# EAGLE board Stepper Driver jig bottom (EAGLE 6.6.0)
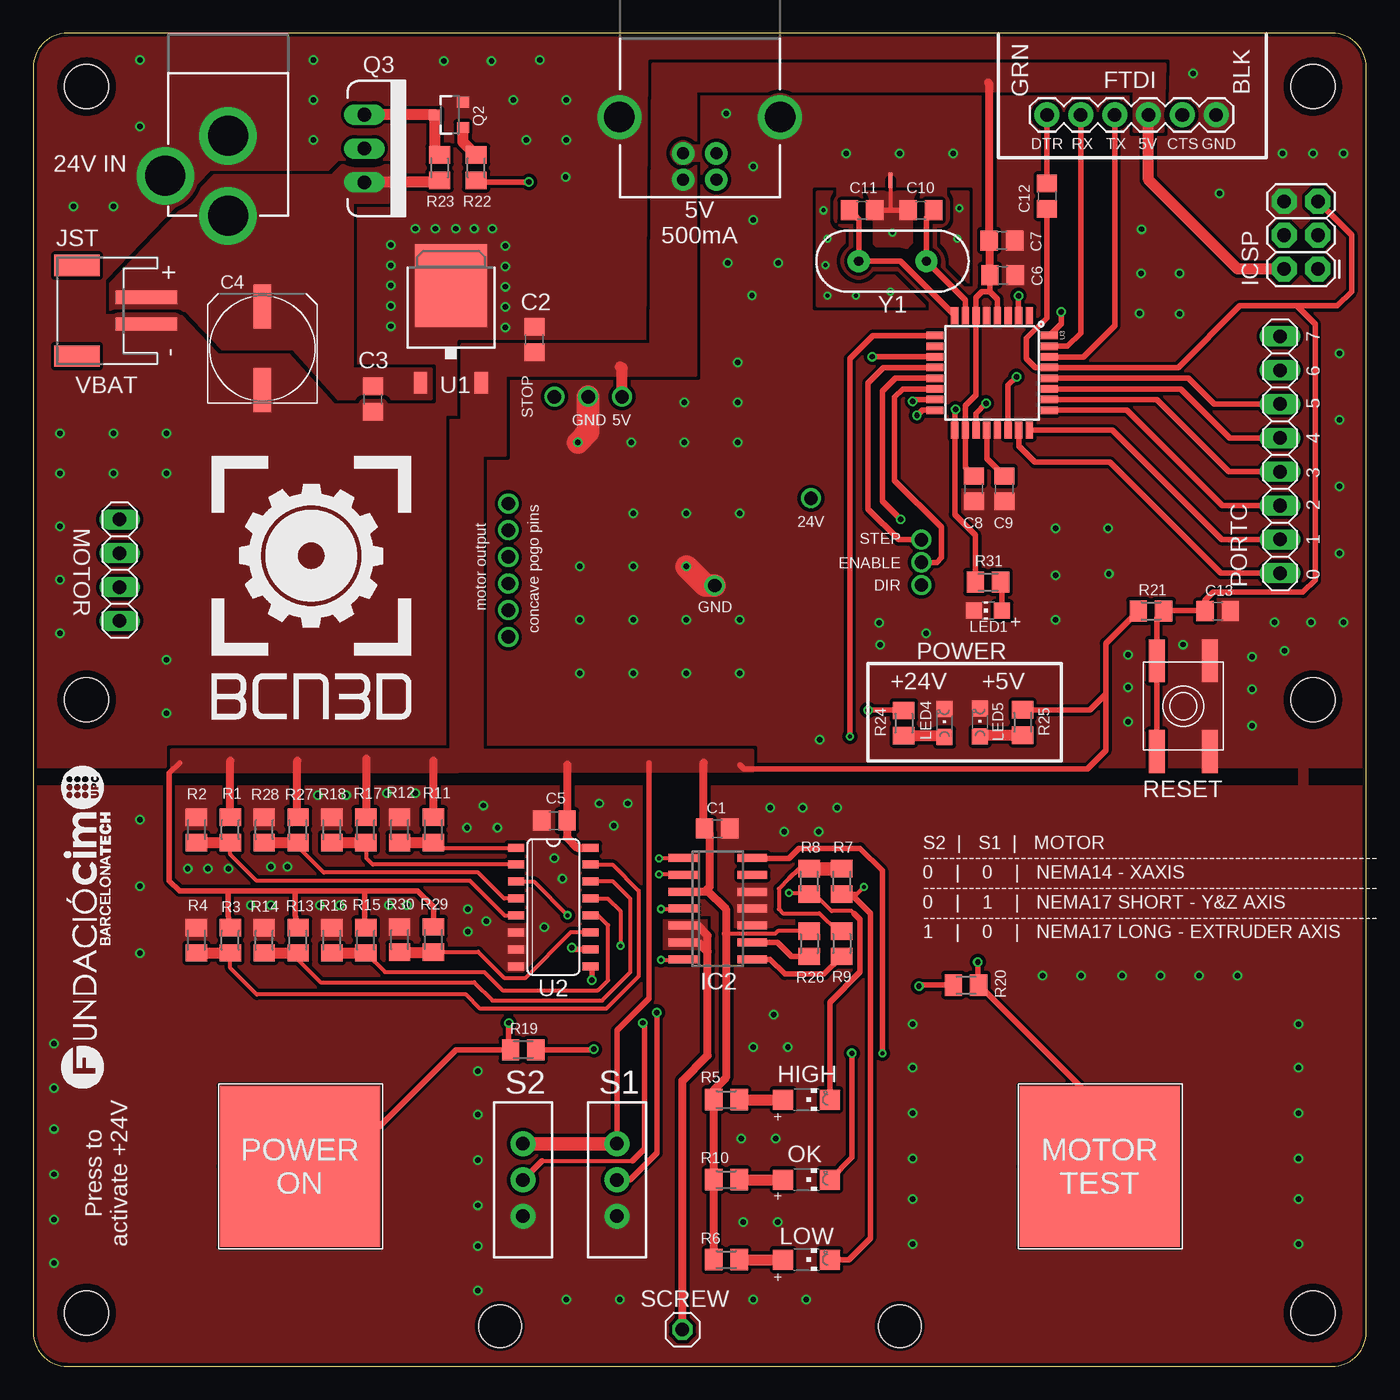
[diagram p0: board, top side]
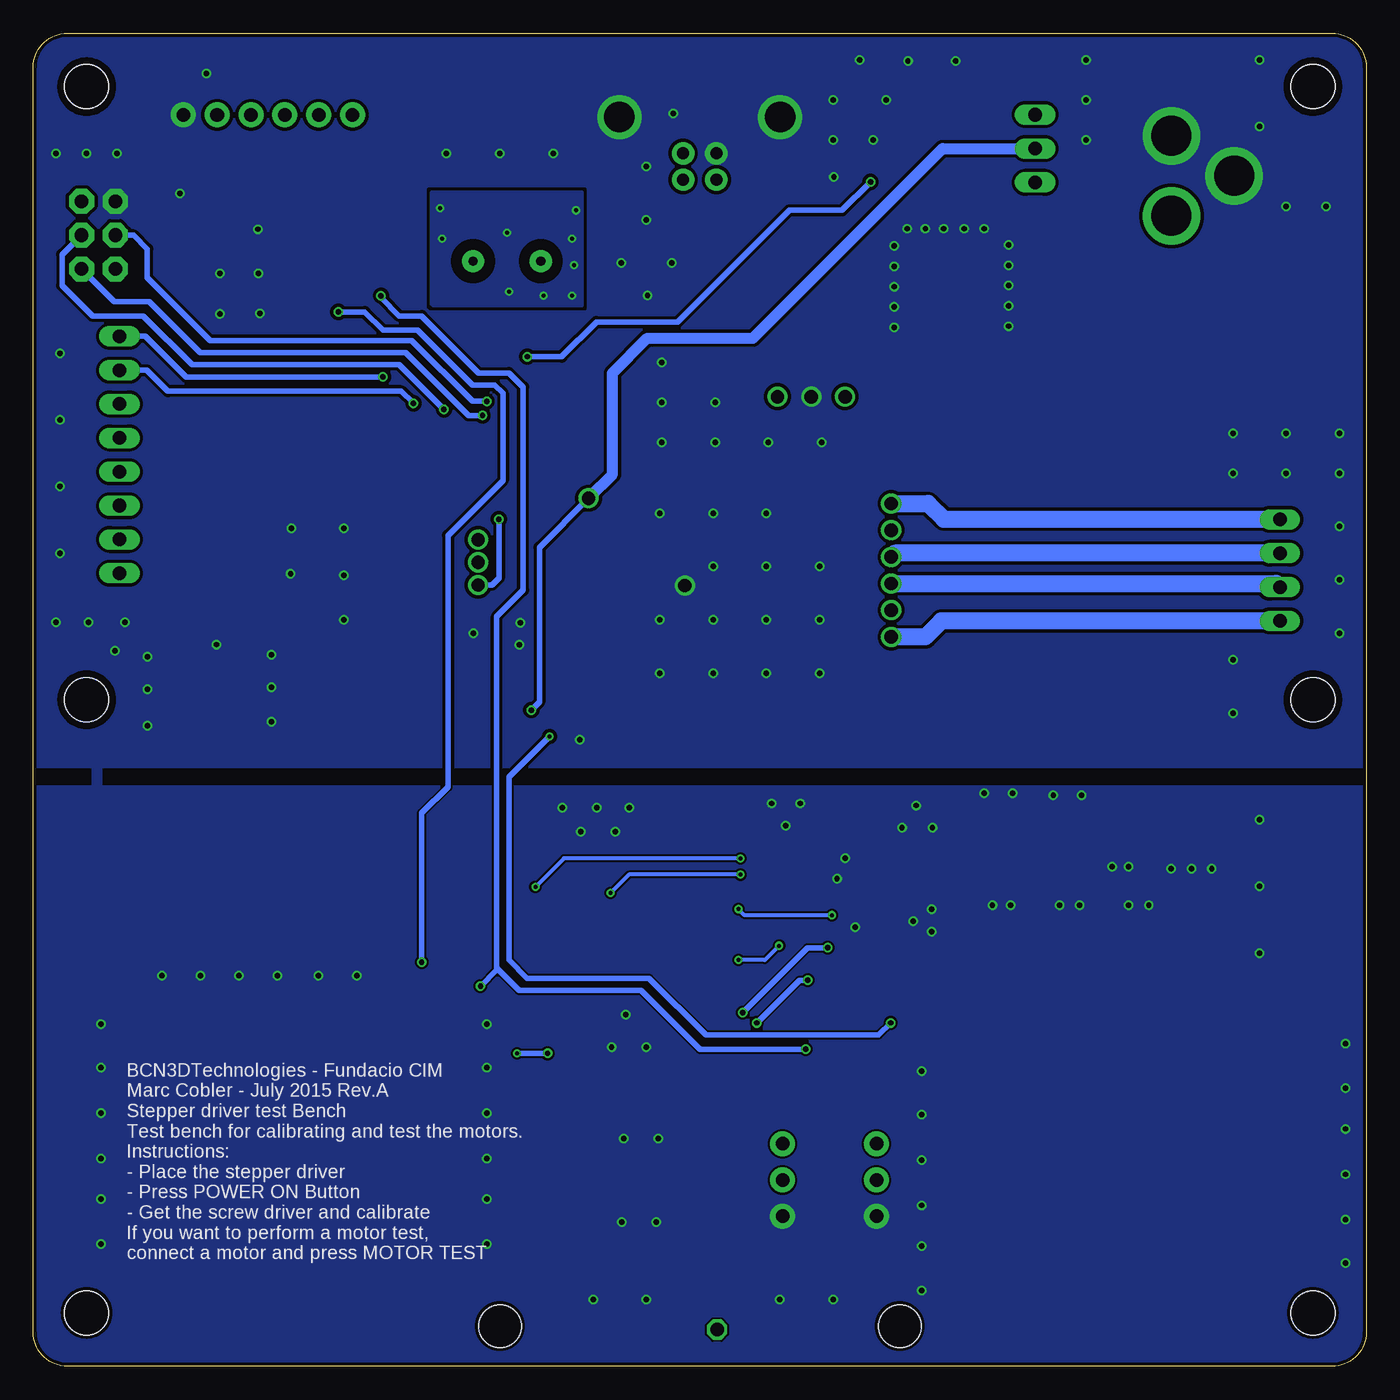
[diagram p1: board, bottom side, seen from below]

Size 100 x 100 mm. Coordinates in mm from the lower left corner, seen from the top.
Outline: 0,97.46 0,2.54 arc90 2.54,0 97.46,0 arc90 100,2.54 100,97.46 arc90 97.46,100 2.54,100 arc90 0,97.46
Copper layers (1*16): Top 0.035mm / dielectric 1.5mm / Bottom 0.035mm
Design rules "ITEADstudio_DRC": minimum track width 6mil, minimum drill 12mil, track to track 6mil, track to pad 6mil, pad to pad 6mil, via to via 6mil, smd to smd 0mil, copper to edge 10mil, drill to drill 10mil, minimum pad ring 10mil, minimum via ring 6mil, stop-mask expansion 2mil, vias tented up to drill 100mil, thermal gap 10mil
Holes 3.2 mm at 35,3 65,3

## Footprints (pad centres in the part's own frame; a part is rotated, then mirrored left to right if it is on the bottom)
C0805 = smd 1.3 x 1.5: 1 -0.95,0; 2 0.95,0
UD-8X10_NICHICON = smd 3.3 x 1.3: + 3.125,0; - -3.125,0
FTDI_BASIC = drill 1.016 pad 1.88: CTS 10.16,0; DTR 0,0; GND 12.7,0; RXI 2.54,0; TXO 5.08,0; VCC 7.62,0
CHIPLED_1206 = smd 1.5 x 1.5: A 0,-1.75; C 0,1.75
SO14 = smd 0.6 x 2.2: 1 -3.81,-2.6; 2 -2.54,-2.6; 3 -1.27,-2.6; 4 0,-2.6; 5 1.27,-2.6; 6 2.54,-2.6; 7 3.81,-2.6; 8 3.81,2.6; 9 2.54,2.6; 10 1.27,2.6; 11 0,2.6; 12 -1.27,2.6; 13 -2.54,2.6; 14 -3.81,2.6
2X3 = drill 1.016 pad 1.88 octagon: 1 0,0; 2 0,2.54; 3 2.54,0; 4 2.54,2.54; 5 5.08,0; 6 5.08,2.54
POWER_JACK_PTH = drill 2.997 pad 4.318: GND 0,7.7; GNDBREAK 4.7,10.7; PWR 0,13.7
POGOPIN = drill 1 pad 1.27: P$1 0,0
JST-PH-2-SMT-RA = smd 1 x 4.6: 1 1,-3.7; 2 -1,-3.7 | smd 1.6 x 3.4: NC1 -3.4,1.5; NC2 3.4,1.5
CHIP-LED0805 = smd 1.2 x 1.2: A 0,-1.05; C 0,1.05
CHIPLED_0805 = smd 1.2 x 1.2: A 0,-1.05; C 0,1.05
1X04 = drill 1.016 long: 1 -3.81,0; 2 -1.27,0; 3 1.27,0; 4 3.81,0
1X08 = drill 1.016 long: 1 -8.89,0; 2 -6.35,0; 3 -3.81,0; 4 -1.27,0; 5 1.27,0; 6 3.81,0; 7 6.35,0; 8 8.89,0
SOT23-3 = smd 0.8 x 0.9: 1 -0.95,-1; 2 0.95,-1; 3 0,1.1
TO220V = drill 1.016 long: 1 -2.54,0; 2 0,0; 3 2.54,0
M0805 = smd 1.3 x 1.6: 1 -0.95,0; 2 0.95,0
EVQ-Q2 = smd 3.2 x 1.2: A -3.4,-2; A' 3.4,-2; B -3.4,2; B' 3.4,2
SWITCH-SPDT_KIT = drill 1.016 pad 1.88: 1 0,2.718; 2 0,0; 3 0,-2.718
1X01 = drill 1.016 octagon: 1 0,0
SHORT_TOP-50 = smd 0.61 x 0.305: 1 0.381,0; 2 -0.127,0
TO-252 = smd 1 x 1.6: 1 -2.28,-4.8; 2 2.28,-4.8 | smd 5.4 x 6.2: 3 0,2.5
SO16 = smd 0.6 x 1.2: 1 -4.445,-2.8; 2 -3.175,-2.8; 3 -1.905,-2.8; 4 -0.635,-2.8; 5 0.635,-2.8; 6 1.905,-2.8; 7 3.175,-2.8; 8 4.445,-2.8; 9 4.445,2.8; 10 3.175,2.8; 11 1.905,2.8; 12 0.635,2.8; 13 -0.635,2.8; 14 -1.905,2.8; 15 -3.175,2.8; 16 -4.445,2.8
TQFP32-08 = smd 1.27 x 0.559: 1 -4.293,2.8; 2 -4.293,2; 3 -4.293,1.2; 4 -4.293,0.4; 5 -4.293,-0.4; 6 -4.293,-1.2; 7 -4.293,-2; 8 -4.293,-2.8; 17 4.293,-2.8; 18 4.293,-2; 19 4.293,-1.2; 20 4.293,-0.4; 21 4.293,0.4; 22 4.293,1.2; 23 4.293,2; 24 4.293,2.8 | smd 0.559 x 1.27: 9 -2.8,-4.293; 10 -2,-4.293; 11 -1.2,-4.293; 12 -0.4,-4.293; 13 0.4,-4.293; 14 1.2,-4.293; 15 2,-4.293; 16 2.8,-4.293; 25 2.8,4.293; 26 2,4.293; 27 1.2,4.293; 28 0.4,4.293; 29 -0.4,4.293; 30 -1.2,4.293; 31 -2,4.293; 32 -2.8,4.293
CAPSENSE_PAD = smd 12 x 6.1: P$1 0,3; P$2 0,-3
USB-B-PTH = drill 0.914 pad 1.676: D+ 0,1.25; D- 1.981,1.25; GND 0,-1.25; VBUS 1.981,-1.25 | drill 2.286: S1 -2.718,-6.02; S2 -2.718,6.02
STAND-OFF = hole 3.302: 0,0
HC49US = drill 0.7 pad 1.651: 1 -2.54,0; 2 2.54,0

## Placement (x,y rotation side)
C1  100n  [C0805]  51.31,40.34 0 top
C2  1uF  [C0805]  37.59,77.01 90 top
C3  0.33uF  [C0805]  25.48,72.56 270 top
C4  100uF  [UD-8X10_NICHICON]  17.19,76.35 90 top
C5  100n  [C0805]  39.09,40.93 180 top
C6  100n  [C0805]  72.72,81.84 0 top
C7  100n  [C0805]  72.67,84.46 0 top
C8  100n  [C0805]  70.56,65.84 270 top
C9  100n  [C0805]  72.85,65.84 270 top
C10  22p  [C0805]  66.6,86.72 180 top
C11  22p  [C0805]  62.18,86.72 0 top
C12  100n  [C0805]  76.05,87.78 90 top
C13  100n  [C0805]  88.86,56.65 0 top
FTDI  FTDI_BASICPTH  [FTDI_BASIC]  76.05,93.88 0 top
HIGH  [CHIPLED_1206]  58,20 270 top
IC2  LM339D  [SO14]  51.34,34.33 270 top
ICSP  AVR_SPI_PRG_6PTH  [2X3]  96.38,82.31 90 top
JP1  POWER_JACKPTH  [POWER_JACK_PTH]  14.6,100.01 180 top
JP2  [POGOPIN]  35.64,64.72 0 top
JP3  [POGOPIN]  35.64,62.72 0 top
JP4  [POGOPIN]  35.64,60.72 0 top
JP5  [POGOPIN]  35.64,58.72 0 top
JP6  [POGOPIN]  35.64,56.72 0 top
JP7  [POGOPIN]  35.64,54.72 0 top
JP8  [POGOPIN]  51.11,58.57 0 top
JP9  [POGOPIN]  58.35,65.12 0 top
JP10  [POGOPIN]  66.63,62.01 0 top
JP11  [POGOPIN]  66.63,58.61 0 top
JP12  [POGOPIN]  66.63,60.31 0 top
JP13  [POGOPIN]  44.17,72.74 90 top
JP14  [POGOPIN]  41.63,72.74 90 top
JP15  [POGOPIN]  39.09,72.74 90 top
JST  [JST-PH-2-SMT-RA]  4.78,79.18 90 top
LED1  [CHIP-LED0805]  71.63,56.69 90 top
LED4  [CHIPLED_0805]  68.36,48.25 0 top
LED5  [CHIPLED_0805]  71.02,48.3 0 top
LOW  [CHIPLED_1206]  58,8 270 top
MOTOR  [1X04]  6.48,59.72 270 top
OK  [CHIPLED_1206]  58,14 270 top
PORTC  [1X08]  93.54,68.38 90 top
Q2  MMBT2222A  [SOT23-3]  31.24,93.88 90 top
Q3  MOSFET-PCHANNELFQP27P06  [TO220V]  24.84,91.35 270 top
R1  [M0805]  14.78,40.23 270 top
R2  [M0805]  12.24,40.23 270 top
R3  [M0805]  14.78,31.95 270 top
R4  [M0805]  12.24,31.95 270 top
R5  1K  [M0805]  52,20 180 top
R6  1K  [M0805]  52,8 180 top
R7  68.1K  [M0805]  60.66,36.37 270 top
R8  68.1K  [M0805]  58.22,36.37 270 top
R9  10K  [M0805]  60.66,31.7 90 top
R10  1K  [M0805]  52,14 180 top
R11  [M0805]  30.02,40.23 270 top
R12  [M0805]  27.48,40.23 270 top
R13  [M0805]  19.86,31.95 270 top
R14  [M0805]  17.32,31.95 270 top
R15  [M0805]  24.94,31.95 270 top
R16  [M0805]  22.4,31.95 270 top
R17  [M0805]  24.94,40.23 270 top
R18  [M0805]  22.4,40.23 270 top
R19  10M  [M0805]  36.75,23.74 0 top
R20  10M  [M0805]  69.98,28.59 180 top
R21  10K  [M0805]  83.86,56.66 180 top
R22  100  [M0805]  33.22,89.92 270 top
R23  10K  [M0805]  30.48,89.92 90 top
R24  5.6K  [M0805]  65.31,48.25 90 top
R25  5.6K  [M0805]  74.23,48.3 90 top
R26  68.1K  [M0805]  58.22,31.7 90 top
R27  [M0805]  19.86,40.23 270 top
R28  [M0805]  17.32,40.23 270 top
R29  [M0805]  30.02,32 270 top
R30  [M0805]  27.48,32 270 top
R31  1K  [M0805]  71.63,58.83 180 top
RESET  SPST_TACT-EVQQ2  [EVQ-Q2]  86.28,49.52 270 top
S1  [SWITCH-SPDT_KIT]  43.79,13.97 0 top
S2  [SWITCH-SPDT_KIT]  36.74,13.97 0 top
SCREW  [1X01]  48.7,2.74 0 top
SH1  SHORTT5  [SHORT_TOP-50]  64.31,88.85 90 top
U1  +5V  [TO-252]  31.34,78.57 0 top
U2  74HC4052  [SO16]  39.02,34.45 270 top
U3  ATMEGA328P  [TQFP32-08]  71.93,74.52 270 top
U$1  CAPSENSE_PAD  [CAPSENSE_PAD]  80,15 0 top
U$2  CAPSENSE_PAD  [CAPSENSE_PAD]  20,15 0 top
U$3  USB+SHIELD  [USB-B-PTH]  50,91 270 top
U$4  [STAND-OFF]  96,96 0 top
U$5  [STAND-OFF]  4,96 0 top
U$6  [STAND-OFF]  4,4 0 top
U$7  [STAND-OFF]  96,4 0 top
U$8  [STAND-OFF]  96,50 0 top
U$9  [STAND-OFF]  4,50 0 top
U$10  [FCIM_LOGO]  9.46,19.01 90 top
U$11  [BCN3D_LOGO]  13.38,48.53 0 top
Y1  [HC49US]  64.47,82.91 0 top

## Library data of the parts
C1-C13 = rcl
FTDI ICSP U$3 = SparkFun-Connectors
HIGH JST LED1 LED4 LED5 LOW OK R1-R31 RESET = adafruit
IC2 = linear
JP1 = SparkFun-Connectors; PROD_ID: CONN-08197
JP2-JP15 U$10 U$11 = MarcEagleParts
MOTOR PORTC SCREW = pinhead
Q2 = SparkFun-DiscreteSemi; PROD_ID: TRANS-08049
Q3 = SparkFun-DiscreteSemi
S1 S2 = SparkFun-Electromechanical; PROD_ID: SWCH-08261
SH1 = shorts; BOM: no
U1 = SparkFun-PowerIC; PROD_ID: VREG-12370
U2 = SparkFun-AnalogIC; PROD_ID: IC-09813
U3 = SparkFun-DigitalIC; PROD_ID: IC-09069
U$1 U$2 U$4-U$9 = SparkFun-Electromechanical
Y1 = SparkFun-FreqCtrl

## Nets
5V: C1.1 C2.1 C5.1 C6.1 C7.1 C8.1 FTDI.VCC IC2.3 ICSP.2 JP13.P$1 R1.1 R3.1 R5.2 R6.2 R10.2 R11.1 R13.1 R15.1 R17.1 R21.2 R25.2 R26.2 R27.1 R29.1 S1.1 S2.1 U1.2 U2.16 U3.4 U3.6 U3.18 U$3.VBUS
24VON: JP9.P$1 Q3.2 R24.2
24VPWR: R22.2 U3.11
!ENABLE: JP12.P$1 U3.14
!RESET: C12.1 C13.1 ICSP.5 R21.1 RESET.A RESET.A' U3.29
CGND: C10.2 C11.2 SH1.2
CTS: FTDI.CTS
DIR: JP11.P$1 U3.13
DTR: C12.2 FTDI.DTR
GND: C1.2 C2.2 C3.2 C4.- C5.2 C6.2 C7.2 C8.2 C9.2 C13.2 FTDI.GND IC2.10 IC2.11 IC2.12 ICSP.6 JP1.GND JP1.GNDBREAK JP8.P$1 JP14.P$1 JST.2 LED1.C LED4.C LED5.C Q2.2 R2.1 R4.1 R12.1 R14.1 R16.1 R18.1 R28.1 R30.1 RESET.B RESET.B' S1.3 S2.3 SH1.1 U1.3 U2.6 U2.7 U2.8 U3.3 U3.5 U3.21 U$3.GND U$3.S1 U$3.S2
MISO: ICSP.1 U3.16
MOSI: ICSP.4 U3.15
N$2: IC2.4 U2.3
N$3: IC2.7 U2.13
N$4: IC2.1 LOW.C R7.2
N$5: LOW.A R6.1
N$6: HIGH.C IC2.2 R8.2
N$7: HIGH.A R5.1
N$8: R7.1 R8.1 R9.2
N$9: IC2.8 R9.1
N$10: OK.A R10.1
N$11: IC2.14 OK.C
N$12: R11.2 R12.2 U2.1
N$13: R1.2 R2.2 U2.5
N$14: R3.2 R4.2 U2.15
N$15: R13.2 R14.2 U2.14
N$16: R15.2 R16.2 U2.12
N$17: R17.2 R18.2 U2.2
N$19: S1.2 U2.10
N$20: S2.2 U2.9
N$21: R19.1 U3.9 U$2.P$1 U$2.P$2
N$22: C11.1 U3.8 Y1.1
N$23: C9.1 U3.20
N$24: C10.1 U3.7 Y1.2
N$25: Q2.3 Q3.1 R23.2
N$26: Q2.1 R22.1
N$27: R19.2 R20.2 U3.2
N$29: R20.1 U3.32 U$1.P$1 U$1.P$2
N$30: JP5.P$1 MOTOR.3
N$31: JP4.P$1 MOTOR.2
N$32: JP3.P$1
N$33: JP6.P$1
N$36: JP15.P$1
N$38: JP2.P$1 MOTOR.1
N$41: LED4.A R24.1
N$42: LED5.A R25.1
N$45: U3.1
N$46: U3.10
N$47: JP7.P$1 MOTOR.4
N$48: IC2.9 R26.1
N$49: R27.2 R28.2 U2.4
N$50: R29.2 R30.2 U2.11
N$51: LED1.A R31.1
PC0: PORTC.1 U3.23
PC1: PORTC.2 U3.24
PC2: PORTC.3 U3.25
PC3: PORTC.4 U3.26
PC4: PORTC.5 U3.27
PC5: PORTC.6 U3.28
PC6: PORTC.7 U3.19
PC7: PORTC.8 U3.22
RX: FTDI.RXI U3.31
SCK: ICSP.3 R31.2 U3.17
SCREW: IC2.5 IC2.6 SCREW.1
STEP: JP10.P$1 U3.12
TX: FTDI.TXO U3.30
VIN: C3.1 C4.+ JP1.PWR JST.1 Q3.3 R23.1 U1.1

## Tracks (layer width: path | path; a pad name or v marks a point on that pad's centre or on a via)
5V
  Top 0.305: R26.2 55.87,32.65 55.65,32.44 51.99,32.44 51.97,32.46
  Top 0.406: 24.84,35.66 28.84,35.66 30.02,34.48 R29.1 | 24.84,35.66 19.66,35.66 | 19.66,35.66 14.63,35.66 | 14.63,35.66 10.97,35.66 10.21,36.42 10.21,44.5 10.97,45.26 | 53.03,45.11 53.34,44.8 79.09,44.8 80.47,46.18 80.47,50.44 | S1.1 43.79,25.19 46.18,27.58 46.18,45.26 | R15.1 24.84,33.77 24.84,35.66 | R13.1 19.66,33.87 19.66,35.66 | R3.1 14.63,33.82 14.63,35.66 | C6.1 71.77,80.63 | 71.77,80.63 72.33,80.07 U3.4 | 71.77,80.63 71.76,80.62 71.17,80.62 70.73,80.18 U3.6 70.71,78.8 70.71,72.85 69.93,72.07 U3.18 69.93,67.42 C8.1 | R21.2 80.47,54.22 80.47,50.44 | R25.2 79.27,49.25 80.47,50.44
  Top 0.61: R1.1 14.78,45.41 | R27.1 19.81,41.23 19.81,45.41 | R17.1 24.99,41.23 24.99,45.57 | R11.1 30.02,45.41 | 40.08,45.11 40.08,40.96 C5.1 40.04,39.66 40.81,38.9 U2.16 | 50.29,45.26 50.29,40.4 C1.1 50.75,39.94 50.75,35.97 50.52,35.74 | 50.52,35.74 50.38,35.59 IC2.3 | R6.2 R10.2 R5.2 51.05,20.72 51.97,21.64 51.97,32.46 51.97,34.29 50.52,35.74 | 71.63,96.32 71.72,96.23 C7.1 71.72,81.89 C6.1
  Top 0.813: ICSP.2 90.35,82.31 83.67,89 FTDI.VCC | JP13.P$1 44.17,74.85 44.04,74.98
  Top 1.016: S2.1 S1.1
  pour Top (isolate 0.406, no thermals): 32.22,76.66 40.08,76.66 40.08,74.37 35.36,74.37 35.36,68.36 33.65,68.36 33.65,46.18 53.94,46.18 53.94,44.65 31.36,44.65 31.36,70.95 32.22,70.95
  pour Top (isolate 0.406, no thermals): 84.73,92.66 82.6,92.66 82.6,95.71 49.68,95.71 49.68,74.37 39.17,74.37 39.17,76.66 46.33,76.66 46.48,97.69 84.89,97.69
  pour Top (isolate 0.406, no thermals): 31.85,46.18 10.36,46.18 10.36,44.65 31.85,44.65
24VON  (via drill 0.41)
  Top 0.406: v62.64,49.23 65.28,49.23 R24.2
  Bottom 0.406: JP9.P$1 62.03,61.44 62.03,49.84 v62.64,49.23
  Bottom 0.813: JP9.P$1 56.56,66.9 56.56,74.5 53.95,77.11 46.02,77.11 31.79,91.35 Q3.2
24VPWR  (via drill 0.41)
  Top 0.406: v37.19,88.85 33.34,88.85 R22.2 | v62.94,75.74 67.62,75.74 U3.11
  Bottom 0.406: v37.19,88.85 39.32,86.72 43.28,86.72 51.66,78.33 57.76,78.33 60.35,75.74 v62.94,75.74
!ENABLE
  Top 0.406: U3.14 65.25,73.32 64.62,72.69 64.62,66.45 68.12,62.94 68.12,60.66 67.78,60.31 JP12.P$1
!RESET
  Top 0.406: ICSP.5 98.91,84.87 98.91,80.62 97.84,79.55 94.79,79.55 | RESET.A' RESET.A 84.28,56.13 R21.1 84.85,56.71 87.85,56.71 C13.1 87.91,57.43 88.54,58.06 95.25,58.06 96.16,58.98 96.16,78.18 94.79,79.55 | 94.79,79.55 90.53,79.55 85.9,74.92 U3.29 75.19,74.92 74.52,75.59 74.52,77.11 76.05,78.64 C12.1 75.89,86.68
CGND  (via drill 0.3)
  Top 0.305: SH1.2 64.31,86.72 64.62,86.72
  Top 0.406: C11.2 64.62,86.72 C10.2
  other vias: 59.59,84.58 64.47,85.04 69.34,84.58 64.31,80.62 61.72,80.31 59.59,80.31 59.44,82.6 69.49,86.87 59.28,86.72
  pour Top (isolate 0.813, no thermals): 58.83,88.09 58.83,79.55 70.1,79.55 70.1,88.09
  pour Bottom (isolate 0.813, no thermals): 58.83,88.09 58.83,79.55 70.1,79.55 70.1,88.09
DIR  (via drill 0.41)
  Top 0.406: U3.13 64.67,74.12 63.7,73.15 63.7,64.92 v65.08,63.55
  Bottom 0.406: v65.08,63.55 65.08,59.13 65.6,58.61 JP11.P$1
DTR
  Top 0.406: FTDI.DTR C12.2
GND  (via drill 0.41)
  Top 1.676: v49,60 50.42,58.58 JP8.P$1 | JP14.P$1 41.63,70.08 v40.85,69.3
  other vias: 26.82,82.6 26.82,81.08 26.82,78.03 26.82,79.55 26.82,84.12 30.18,85.34 31.7,85.34 34.44,85.34 33.07,85.34 28.65,85.34 35.42,82.52 35.42,80.99 35.42,77.94 35.42,79.47 35.42,84.04 11.58,37.34 13.11,37.34 14.63,37.34 17.83,37.49 19.05,37.49 23.47,42.82 26.52,42.98 32.61,34.29 32.61,32.61 16.31,34.59 17.83,34.59 21.49,34.59 23.01,34.59 26.67,34.59 28.04,34.59 45,64 49,64 53,64 41,60 45,60 41,56 45,56 49,56 53,56 53,52 49,52 45,52 41,52 10,53 2,55 2,67 10,67 6,70 6,87 3,87 8,93 8,98 21,98 21,95 21,92 34.38,97.91 36,95 37,92 39.93,89.22 52,94 54,90 54,86 61,91 65,91 69,91 83.15,85.3 86,82 83,79 89,88 96,91 87,97 98,76 98,71 98,66 98,61 76.7,62.87 80.63,62.85 76.7,59.32 76.7,56 80.7,59.46 67,55 63.46,55.76 63.52,54.13 59,47 44.61,42.22 32.54,40.39 8,31 8,36 8,41 94.93,15.57 94.93,18.98 94.93,22.39 94.93,25.65 55.55,26.36 54.03,23.92 56.62,23.92 53.11,17.06 55.7,17.06 53.27,10.82 55.86,10.82 93.12,55.82 98.3,55.82 95.87,55.82 91.45,53.23 91.45,50.79 91.45,48.05 93.89,53.68 86.27,54.14 82.15,53.38 82.15,50.94 82.15,48.35 44.85,69.3 48.85,69.3 52.85,69.3 48.85,72.3 52.85,72.3 52.85,75.3 33.99,33.38 30.79,97.91 40,92 40,95 38,98 2,70 10,70 6,67 2,59 2,63 10,49 52.09,82.76 55.9,82.76 53.92,80.33 40,5 44,5 54,5 58,5 21.34,42.82 28.65,42.98 34.83,40.39 33.76,42.07 39.1,38.1 39.71,36.58 38.33,32.92 98.29,91 93.71,91 83.1,82 86,78.95 75.73,29.3 78.63,29.3 81.67,29.3 84.57,29.3 87.47,29.3 90.36,29.3 94.93,12.52 94.93,9.17 65.98,15.57 65.98,18.98 65.98,22.39 65.98,25.65 65.98,12.52 65.98,9.17 1.54,17.8 1.54,14.39 1.54,10.99 1.54,7.73 1.54,20.85 1.54,24.2 33.36,12.07 33.36,15.48 33.36,18.89 33.36,22.14 33.36,9.02 33.36,5.67 43.54,40.54 42.48,42.22 55.28,41.91 57.72,41.91 60.31,41.91 56.34,40.09 58.94,40.09
  pour Top (isolate 0.254, rank 6, no thermals): -1,43.46 101,43.46 101,-1 -1,-1
  pour Bottom (isolate 0.254, rank 6, no thermals): 0,100 100,100 100,45 -1,45
  pour Top (isolate 0.254, rank 6, no thermals): -1,101 101,101 101,45 -1,45
  pour Top (rank 6, no thermals): 95,46 95,42.07 95.54,42.07 95.54,46
  pour Bottom (rank 6, no thermals): -0.91,43.43 101.04,43.43 101.04,-0.91 -0.91,-0.91
  pour Bottom (rank 6, no thermals): 95.5,46 95.5,42.07 94.96,42.07 94.96,46
MISO  (via drill 0.41)
  Top 0.406: U3.16 66.69,71.72 v66.29,71.32
  Bottom 0.406: v66.29,71.32 67.36,71.32 72.08,76.05 87.48,76.05 91.29,79.86 93.92,79.86 ICSP.1
MOSI  (via drill 0.41)
  Top 0.406: U3.15 66.12,72.52 v65.99,72.39
  Bottom 0.406: v65.99,72.39 67.06,72.39 71.63,76.96 86.72,76.96 91.44,81.69 91.44,83.82 92.47,84.86 ICSP.4
N$2  (via drill 0.3, 0.3 pad 0.3)
  Top 0.305: U2.3 37.56,36.36 v40.08,33.83 | v47.09,34.29 48.71,34.29 IC2.4
  Bottom 0.305: v40.08,33.83 46.63,33.83 v47.09,34.29
N$3  (via drill 0.3 pad 0.3)
  Top 0.305: U2.13 43.09,35.09 44.04,34.14 v44.04,31.55 | v47.09,30.48 48.71,30.48 IC2.7
  Bottom 0.305: v44.04,31.55 45.11,30.48 v47.09,30.48
N$4  (via drill 0.3 pad 0.3)
  Top 0.305: IC2.1 48.71,38.1 v46.94,38.1 | v62.33,35.97 61.79,35.42 R7.2
  Top 0.406: LOW.C 61.19,8 62.79,9.6 62.79,33.98 61.35,35.42 R7.2
  Bottom 0.305: v46.94,38.1 60.2,38.1 v62.33,35.97
N$5
  Top 0.813: R6.1 LOW.A
N$6  (via drill 0.3 pad 0.3)
  Top 0.305: 61.57,33.98 61.42,34.14 59.89,34.14 58.61,35.42 R8.2 58.13,35.51 v56.69,35.51 | IC2.2 48.73,36.88 v46.94,36.88
  Top 0.406: 61.57,33.98 62.03,33.53 62.03,29.57 59.75,27.29 HIGH.C
  Bottom 0.305: v46.94,36.88 55.32,36.88 v56.69,35.51
N$7
  Top 0.813: R5.1 HIGH.A
N$8
  Top 0.305: R9.2 60.31,32.65 58.98,33.98 56.24,33.98 55.93,34.29 55.93,35.81 56.69,36.58
  Top 0.356: R7.1 57.44,37.32 56.69,36.58
  Top 1.016: R8.1 R7.1
N$9
  Top 0.406: R9.1 59.32,29.41 56.39,29.41 55.29,30.52 IC2.8
N$10
  Top 0.813: R10.1 OK.A
N$11  (via drill 0.3 pad 0.3, 0.41)
  Top 0.406: OK.C 61.42,15.67 v61.42,23.47 | IC2.14 53.98,38.1 56.69,38.1 57.45,38.86 62.03,38.86 63.7,37.19 v63.7,23.47
  Bottom 0.406: v63.7,23.47 v61.42,23.47
N$12
  Top 0.305: 36.18,38.86 30.02,38.86 R11.2
  Top 0.406: 36.18,38.86 U2.1 | 30.06,38.86 R11.2
  Top 0.813: R12.2 R11.2
N$13
  Top 0.305: 14.48,38.86 14.48,38.98 R1.2 14.78,38.41 16.76,36.42 32.77,36.42 35.37,33.82 U2.5
  Top 0.406: 14.78,38.86 R1.2
  Top 0.813: R2.2 R1.2
N$14
  Top 0.305: U2.15 43.45,37.63 45.41,35.66 45.41,29.26 42.98,26.82 33.53,26.82 32.46,27.89 16.76,27.89 14.78,29.87 R3.2
  Top 0.813: R4.2 R3.2
N$15
  Top 0.305: U2.14 43.5,36.36 44.81,35.05 44.81,29.57 42.67,27.43 34.44,27.43 33.07,28.8 21.55,28.8 19.36,31
  Top 0.813: R14.2 19.36,31 R13.2
N$16
  Top 0.305: U2.12 42.38,33.82 43.13,33.07 43.13,28.96 42.37,28.19 35.2,28.19 33.83,29.57 26.38,29.57 R15.2
  Top 0.813: R16.2 R15.2
N$17
  Top 0.305: U2.2 25.46,37.63 24.99,38.1 24.99,39.23 R17.2
  Top 0.813: R18.2 R17.2
N$19  (via drill 0.41)
  Top 0.406: S1.2 44.75,13.97 46.79,16 v46.79,26.52 | v40.39,31.39 40.5,31.28 U2.10
  Bottom 0.406: v46.79,26.52 41.91,31.39 v40.39,31.39
N$20  (via drill 0.41, 0.41 pad 0.41)
  Top 0.305: 38.16,15.39 44.96,15.39
  Top 0.406: S2.2 38.16,15.39 | 44.96,15.39 45.87,16.31 45.87,25.6 v45.72,25.76 | U2.9 41.91,29.92 v41.91,28.96
  Bottom 0.406: v45.72,25.76 42.52,28.96 v41.91,28.96
N$21  (via drill 0.3 pad 0.3, 0.41)
  Top 0.406: U$2.P$1 20,14 19.36,13.36 | 19,13 19.36,13.36 | 19.36,13.36 19.36,14.33 20,13.68 U$2.P$2 31.74,23.74 R19.1 35.66,23.88 v35.66,25.76 | U3.9 63,77.32 61.34,75.67 61.27,75.59 v61.27,47.24
  Bottom 0.406: v35.66,25.76 36.58,24.84 49.53,24.84 53.8,29.11 62.94,29.11 64.31,30.48 64.31,44.2 v61.27,47.24
N$22
  Top 0.406: U3.8 65.04,82.91 Y1.1 61.92,86.02 C11.1
N$23
  Top 0.406: U3.20 71.53,68.1 C9.1
N$24
  Top 0.406: U3.7 69.93,79.98 Y1.2 67,86.17 C10.1
N$25
  Top 0.813: R23.2 30.14,91.2 Q2.3 30.13,93.89 Q3.1
N$26
  Top 0.813: R22.1 32.24,91.85 Q2.1
N$27  (via drill 0.41)
  Top 0.406: R19.2 42.02,23.74 v42.06,23.77 | v73.91,80.31 73.91,78.83 U3.2 | v66.45,28.5 66.54,28.59 R20.2
  Bottom 0.406: v66.45,28.5 65.23,29.72 65.23,29.87 | 65.23,29.87 65.23,56.24 63.25,58.22 63.25,73.46 64.31,74.52 66.6,74.52 70.87,78.79 72.54,78.79 73.91,80.16 v73.91,80.31 | v42.06,23.77 49.99,23.77 54.41,28.19 63.55,28.19 65.23,29.87
N$29  (via drill 0.41)
  Top 0.406: 74.29,12 U$1.P$2 U$1.P$1 80,19.52 R20.1 70.87,28.66 v70.87,30.33 | U3.32 77.11,78.21 v77.11,79.1
  Bottom 0.406: v70.87,30.33 70.87,41.49 68.89,43.47 68.89,62.33 64.77,66.45 64.77,73 65.38,73.61 67.06,73.61 71.17,77.72 73.76,77.72 75.13,79.1 v77.11,79.1
N$30
  Bottom 1.27: JP5.P$1 6.75,58.72 MOTOR.3
N$31
  Bottom 1.27: 35.36,61 JP4.P$1 35.37,60.99 MOTOR.2
N$38
  Bottom 1.27: JP2.P$1 32.87,64.72 31.7,63.55 6.5,63.55 MOTOR.1
N$41
  Top 0.813: LED4.A 68.26,47.3 R24.1
N$42
  Top 0.813: LED5.A 71.12,47.35 R25.1
N$47
  Bottom 1.27: MOTOR.4 31.87,55.91 33.07,54.71 JP7.P$1
N$48
  Top 0.406: IC2.9 55.84,31.79 56.88,30.75 R26.1
N$49
  Top 0.305: U2.4 35.32,35.09 33.38,37.03 21.79,37.03 19.86,38.96 R27.2
  Top 0.813: R28.2 R27.2
N$50
  Top 0.305: U2.11 40.32,32.55 36.88,29.11 35.36,29.11 33.38,31.09 30.06,31.09
  Top 0.406: 30.06,31.09 R29.2
  Top 0.813: R30.2 R29.2
N$51
  Top 0.406: R31.1 72.68,58.73 LED1.A
PC0
  Top 0.406: U3.23 73.93,69.02 75.13,67.82 80.77,67.82 89.1,59.49 PORTC.1
PC1
  Top 0.406: PORTC.2 89.15,62.03 80.95,70.23 U3.24
PC2
  Top 0.406: U3.25 82.05,71.72 89.2,64.57 PORTC.3
PC3
  Top 0.406: U3.26 84.3,72.52 89.71,67.11 PORTC.4
PC4
  Top 0.406: U3.27 86.09,73.32 89.76,69.65 PORTC.5
PC5
  Top 0.406: U3.28 86.66,74.12 88.59,72.19 PORTC.6
PC6  (via drill 0.41)
  Top 0.406: U3.19 70.71,70.25 70.71,71.48 v71.48,72.24
  Bottom 0.406: PORTC.7 91.49,74.73 89.92,73.15 72.39,73.15 v71.48,72.24
PC7  (via drill 0.41)
  Top 0.406: v73.76,74.22 73.13,73.59 U3.22
  Bottom 0.406: PORTC.8 91.59,77.27 88.54,74.22 v73.76,74.22
RX
  Top 0.406: U3.31 77.59,76.52 78.59,77.52 FTDI.RXI
SCK  (via drill 0.41)
  Top 0.406: v69.19,71.78 69.13,71.72 U3.17 69.13,63.91 70.68,62.37 R31.2
  Bottom 0.406: v69.19,71.78 72.54,75.13 88.09,75.13 91.75,78.79 95.56,78.79 97.84,81.08 97.84,83.4 ICSP.3
SCREW
  Top 0.61: SCREW.1 48.7,21.42 50.6,23.32 50.6,31.09 | 50.6,31.09 50.6,32.31 49.85,33.05 IC2.5 | IC2.6 49.9,31.79 50.6,31.09
  pour Top (no thermals): 47.24,33.53 50.6,33.53 50.6,31.24 47.24,31.24
STEP
  Top 0.406: U3.12 63.8,74.92 62.64,73.76 62.64,64.31 64.94,62.01 JP10.P$1
TX
  Top 0.406: U3.30 78.77,75.72 81.13,78.08 FTDI.TXO
VIN
  Top 0.813: R23.1 30.33,88.81 Q3.3
  pour Top (isolate 0.61, no thermals): 5.79,79.25 5.79,81.23 13.56,89.31 22.4,89.31 23.16,90.07 26.67,90.07 26.67,87.33 23.93,87.33 23.93,74.83 26.67,74.81 29.85,74.81 29.85,72.61 22.86,72.61 19.51,76.35 14.17,76.35 11.43,79.25

## Text on the board
tPlace: GRN | BLK | DTR | RX | TX | 5V | CTS | GND | 24V IN | 5V / 500mA | 7 | 6 | VBAT | 5 | STOP | GND | 5V | 4 | 3 | 2 | 24V | STEP | 1 | ENABLE | DIR | 0 | motor output | GND | concave pogo pins | POWER | +24V | +5V | S2 | S1 | MOTOR / ---------------------------------------------------------------------- / 0 | 0 | NEMA14 - XAXIS / ---------------------------------------------------------------------- / 0 | 1 | NEMA17 SHORT - Y&Z AXIS / ---------------------------------------------------------------------- / 1 | 0 | NEMA17 LONG - EXTRUDER AXIS | + | POWER / ON | MOTOR / TEST | Press to / activate +24V | + | +
bPlace: BCN3DTechnologies - Fundacio CIM / Marc Cobler - July 2015 Rev.A / Stepper driver test Bench / Test bench for calibrating and test the motors. / Instructions: / - Place the stepper driver / - Press POWER ON Button / - Get the screw driver and calibrate / If you want to perform a motor test, / connect a motor and press MOTOR TEST